# EAGLE board CT_schematic (EAGLE 7.6.0)

Size 100 x 80 mm. Coordinates in mm from the lower left corner, seen from the top.
Outline: 0,0 100,0 100,80 0,80 0,0
Copper layers (1*16): Top 0.035mm / dielectric 1.5mm / Bottom 0.035mm
Design rules "default": minimum track width 10mil, minimum drill 24mil, track to track 8mil, track to pad 8mil, pad to pad 8mil, via to via 8mil, smd to smd 8mil, copper to edge 40mil, drill to drill 8mil, minimum pad ring 10mil, minimum via ring 8mil, stop-mask expansion 4mil, vias tented up to drill 0mil, thermal gap 10mil

## Footprints (pad centres in the part's own frame; a part is rotated, then mirrored left to right if it is on the bottom)
C0603 = smd 0.8 x 0.8: 1 -0.762,0; 2 0.762,0
C0402 = smd 0.5 x 0.5: 1 -0.508,0; 2 0.508,0
EXV-9B = smd 2.718 x 1.778: 1 -2.108,0; 2 2.108,0
EXV-9H = smd 3.505 x 1.676: 1 -2.857,0; 2 2.857,0
PJ-037B_PACKAGE = drill 3.7 square: 1 12,0 | drill 3.2 square: 2 6,0
R0603 = smd 0.8 x 0.8: 1 -0.762,0; 2 0.762,0
LQFP64 = smd 0.3 x 1.2: 1 -3.75,-5.75; 2 -3.25,-5.75; 3 -2.75,-5.75; 4 -2.25,-5.75; 5 -1.75,-5.75; 6 -1.25,-5.75; 7 -0.75,-5.75; 8 -0.25,-5.75; 9 0.25,-5.75; 10 0.75,-5.75; 11 1.25,-5.75; 12 1.75,-5.75; 13 2.25,-5.75; 14 2.75,-5.75; 15 3.25,-5.75; 16 3.75,-5.75; 33 3.75,5.75; 34 3.25,5.75; 35 2.75,5.75; 36 2.25,5.75; 37 1.75,5.75; 38 1.25,5.75; 39 0.75,5.75; 40 0.25,5.75; 41 -0.25,5.75; 42 -0.75,5.75; 43 -1.25,5.75; 44 -1.75,5.75; 45 -2.25,5.75; 46 -2.75,5.75; 47 -3.25,5.75; 48 -3.75,5.75 | smd 1.2 x 0.3: 17 5.75,-3.75; 18 5.75,-3.25; 19 5.75,-2.75; 20 5.75,-2.25; 21 5.75,-1.75; 22 5.75,-1.25; 23 5.75,-0.75; 24 5.75,-0.25; 25 5.75,0.25; 26 5.75,0.75; 27 5.75,1.25; 28 5.75,1.75; 29 5.75,2.25; 30 5.75,2.75; 31 5.75,3.25; 32 5.75,3.75; 49 -5.75,3.75; 50 -5.75,3.25; 51 -5.75,2.75; 52 -5.75,2.25; 53 -5.75,1.75; 54 -5.75,1.25; 55 -5.75,0.75; 56 -5.75,0.25; 57 -5.75,-0.25; 58 -5.75,-0.75; 59 -5.75,-1.25; 60 -5.75,-1.75; 61 -5.75,-2.25; 62 -5.75,-2.75; 63 -5.75,-3.25; 64 -5.75,-3.75
SOIC-8 = smd 1.6 x 0.6: 1 -2.7,1.905 | smd 1.55 x 0.6: 2 -2.7,0.635; 3 -2.7,-0.635; 4 -2.7,-1.905; 5 2.7,-1.905; 6 2.7,-0.635; 7 2.7,0.635; 8 2.7,1.905
TST-110-05-T-D-RA = drill 1 pad 1.7 square: 1 0,0 | drill 1 pad 1.7: 2 0,2.54; 3 2.54,0; 4 2.54,2.54; 5 5.08,0; 6 5.08,2.54; 7 7.62,0; 8 7.62,2.54; 9 10.16,0; 10 10.16,2.54; 11 12.7,0; 12 12.7,2.54; 13 15.24,0; 14 15.24,2.54; 15 17.78,0; 16 17.78,2.54; 17 20.32,0; 18 20.32,2.54; 19 22.86,0; 20 22.86,2.54
TFBGA-153 = smd 0.3 x 0.3: A1 -3.25,3.25; A2 -2.75,3.25; A3 -2.25,3.25; A4 -1.75,3.25; A5 -1.25,3.25; A6 -0.75,3.25; A7 -0.25,3.25; A8 0.25,3.25; A9 0.75,3.25; A10 1.25,3.25; A11 1.75,3.25; A12 2.25,3.25; A13 2.75,3.25; A14 3.25,3.25; B1 -3.25,2.75; B2 -2.75,2.75; B3 -2.25,2.75; B4 -1.75,2.75; B5 -1.25,2.75; B6 -0.75,2.75; B7 -0.25,2.75; B8 0.25,2.75; B9 0.75,2.75; B10 1.25,2.75; B11 1.75,2.75; B12 2.25,2.75; B13 2.75,2.75; B14 3.25,2.75; C1 -3.25,2.25; C2 -2.75,2.25; C3 -2.25,2.25; C4 -1.75,2.25; C5 -1.25,2.25; C6 -0.75,2.25; C7 -0.25,2.25; C8 0.25,2.25; C9 0.75,2.25; C10 1.25,2.25; C11 1.75,2.25; C12 2.25,2.25; C13 2.75,2.25; C14 3.25,2.25; D1 -3.25,1.75; D2 -2.75,1.75; D3 -2.25,1.75; D4 -1.75,1.75; D12 2.25,1.75; D13 2.75,1.75; D14 3.25,1.75; E1 -3.25,1.25; E2 -2.75,1.25; E3 -2.25,1.25; E5 -1.25,1.25; E6 -0.75,1.25; E7 -0.25,1.25; E8 0.25,1.25; E9 0.75,1.25; E10 1.25,1.25; E12 2.25,1.25; E13 2.75,1.25; E14 3.25,1.25; F1 -3.25,0.75; F2 -2.75,0.75; F3 -2.25,0.75; F5 -1.25,0.75; F10 1.25,0.75; F12 2.25,0.75; F13 2.75,0.75; F14 3.25,0.75; G1 -3.25,0.25; G2 -2.75,0.25; G3 -2.25,0.25; G5 -1.25,0.25; G10 1.25,0.25; G12 2.25,0.25; G13 2.75,0.25; G14 3.25,0.25; H1 -3.25,-0.25; H2 -2.75,-0.25; H3 -2.25,-0.25; H5 -1.25,-0.25; H10 1.25,-0.25; H12 2.25,-0.25; H13 2.75,-0.25; H14 3.25,-0.25; J1 -3.25,-0.75; J2 -2.75,-0.75; J3 -2.25,-0.75; J5 -1.25,-0.75; J10 1.25,-0.75; J12 2.25,-0.75; J13 2.75,-0.75; J14 3.25,-0.75; K1 -3.25,-1.25; K2 -2.75,-1.25; K3 -2.25,-1.25; K5 -1.25,-1.25; K6 -0.75,-1.25; K7 -0.25,-1.25; K8 0.25,-1.25; K9 0.75,-1.25; K10 1.25,-1.25; K12 2.25,-1.25; K13 2.75,-1.25; K14 3.25,-1.25; L1 -3.25,-1.75; L2 -2.75,-1.75; L3 -2.25,-1.75; L12 2.25,-1.75; L13 2.75,-1.75; L14 3.25,-1.75; M1 -3.25,-2.25; M2 -2.75,-2.25; M3 -2.25,-2.25; M4 -1.75,-2.25; M5 -1.25,-2.25; M6 -0.75,-2.25; M7 -0.25,-2.25; M8 0.25,-2.25; M9 0.75,-2.25; M10 1.25,-2.25; M11 1.75,-2.25; M12 2.25,-2.25; M13 2.75,-2.25; M14 3.25,-2.25; N1 -3.25,-2.75; N2 -2.75,-2.75; N3 -2.25,-2.75; N4 -1.75,-2.75; N5 -1.25,-2.75; N6 -0.75,-2.75; N7 -0.25,-2.75; N8 0.25,-2.75; N9 0.75,-2.75; N10 1.25,-2.75; N11 1.75,-2.75; N12 2.25,-2.75; N13 2.75,-2.75; N14 3.25,-2.75; P1 -3.25,-3.25; P2 -2.75,-3.25; P3 -2.25,-3.25; P4 -1.75,-3.25; P5 -1.25,-3.25; P6 -0.75,-3.25; P7 -0.25,-3.25; P8 0.25,-3.25; P9 0.75,-3.25; P10 1.25,-3.25; P11 1.75,-3.25; P12 2.25,-3.25; P13 2.75,-3.25; P14 3.25,-3.25
ABLS-25.000MHZ-B2F-T = smd 5.6 x 2.8: 1 -3.81,0; 2 5.69,0
ASEK = smd 1.4 x 1: 1 -1.1,-0.8; 2 1.1,-0.8; 3 1.1,0.8; 4 -1.1,0.8
LP2954 = smd 1.6 x 0.6: 1 -2.475,1.905 | smd 1.55 x 0.6: 2 -2.475,0.635; 3 -2.475,-0.635; 4 -2.475,-1.905; 5 2.475,-1.905; 6 2.475,-0.635; 7 2.475,0.635; 8 2.475,1.905
SON-6 = smd 0.55 x 0.3: 1 -0.355,0.5 | smd 0.52 x 0.3: 2 -0.37,0; 3 -0.37,-0.5; 4 0.37,-0.5; 5 0.37,0; 6 0.37,0.5
SW_4-1437565-2 = smd 1.4 x 2.1: 1 -2.23,4.55; 2 -2.23,-4.55; 3 2.23,4.55; 4 2.23,-4.55
LGM67K-G1J2-24-Z = smd 0.8 x 1.4: A -2,0; C 0,0
NC7SZ125M5X = smd 1.3 x 0.7: 1 -1.3,0.95; 2 -1.3,0; 3 -1.3,-0.95; 4 1.3,-0.95; 5 1.3,0.95

## Placement (x,y rotation side)
C1  1e-07  [C0603]  -22.86,74.93 0 top  (outside the outline)
C2  1e-07  [C0603]  -26.67,74.93 0 top  (outside the outline)
C3  1e-07  [C0603]  -30.48,74.93 0 top  (outside the outline)
C4  1e-07  [C0603]  -34.29,74.93 0 top  (outside the outline)
C5  4.7e-06  [C0603]  -64.77,69.85 0 top  (outside the outline)
C6  1e-07  [C0603]  -38.1,74.93 0 top  (outside the outline)
C7  1e-08  [C0603]  -41.91,74.93 0 top  (outside the outline)
C8  1e-06  [C0603]  -45.72,74.93 0 top  (outside the outline)
C9  1e-11  [C0402]  -64.77,74.93 0 top  (outside the outline)
C10  1e-11  [C0402]  -68.58,74.93 0 top  (outside the outline)
C11  1e-08  [C0402]  -15.24,80.01 0 top  (outside the outline)
C12  1e-08  [C0402]  -19.05,80.01 0 top  (outside the outline)
C13  1e-07  [C0402]  -22.86,80.01 0 top  (outside the outline)
C14  1e-07  [C0402]  -26.67,80.01 0 top  (outside the outline)
C15  1e-07  [C0402]  -30.48,80.01 0 top  (outside the outline)
C16  2.2e-06  [C0603]  -68.58,69.85 0 top  (outside the outline)
C17  2.2e-06  [C0603]  -15.24,74.93 0 top  (outside the outline)
C18  1e-07  [C0402]  -34.29,80.01 0 top  (outside the outline)
C19  1e-07  [C0402]  -38.1,80.01 0 top  (outside the outline)
C20  2.2e-06  [C0603]  -19.05,74.93 0 top  (outside the outline)
C21  1e-08  [C0402]  -41.91,80.01 0 top  (outside the outline)
C22  1e-06  [EXV-9B]  -50.8,50.8 0 top  (outside the outline)
C23  2.2e-06  [EXV-9B]  -59.69,50.8 0 top  (outside the outline)
C24  1e-07  [C0402]  -45.72,80.01 0 top  (outside the outline)
C25  0.0001  [EXV-9H]  -38.1,44.45 0 top  (outside the outline)
C26  0.0001  [EXV-9H]  -49.53,44.45 0 top  (outside the outline)
C27  1e-08  [C0402]  -49.53,80.01 0 top  (outside the outline)
C28  1e-08  [C0402]  -53.34,80.01 0 top  (outside the outline)
C29  1e-08  [C0402]  -57.15,80.01 0 top  (outside the outline)
J1  PJ-037B  [PJ-037B_PACKAGE]  -41.91,7.62 0 top  (outside the outline)
R2  1000.0  [R0603]  -49.53,74.93 0 top  (outside the outline)
R4  4700.0  [R0603]  -53.34,74.93 0 top  (outside the outline)
R5  4700.0  [R0603]  -57.15,74.93 0 top  (outside the outline)
R6  10000.0  [R0603]  -59.69,58.42 0 top  (outside the outline)
R7  10000.0  [R0603]  -64.77,58.42 0 top  (outside the outline)
R8  10000.0  [R0603]  -69.85,58.42 0 top  (outside the outline)
R9  10000.0  [R0603]  -15.24,64.77 0 top  (outside the outline)
R10  10000.0  [R0603]  -20.32,64.77 0 top  (outside the outline)
R11  10000.0  [R0603]  -25.4,64.77 0 top  (outside the outline)
R12  10000.0  [R0603]  -30.48,64.77 0 top  (outside the outline)
R13  10000.0  [R0603]  -35.56,64.77 0 top  (outside the outline)
R14  10000.0  [R0603]  -40.64,64.77 0 top  (outside the outline)
R15  10000.0  [R0603]  -45.72,64.77 0 top  (outside the outline)
R16  10000.0  [R0603]  -50.8,64.77 0 top  (outside the outline)
R17  10000.0  [R0603]  -55.88,64.77 0 top  (outside the outline)
R18  10000.0  [R0603]  -60.96,64.77 0 top  (outside the outline)
R19  34000.0  [R0603]  -66.04,64.77 0 top  (outside the outline)
R20  34000.0  [R0603]  -71.12,64.77 0 top  (outside the outline)
R21  34000.0  [R0603]  -15.24,69.85 0 top  (outside the outline)
R22  34000.0  [R0603]  -20.32,69.85 0 top  (outside the outline)
R23  34000.0  [R0603]  -25.4,69.85 0 top  (outside the outline)
R24  34000.0  [R0603]  -30.48,69.85 0 top  (outside the outline)
R25  34000.0  [R0603]  -35.56,69.85 0 top  (outside the outline)
R26  34000.0  [R0603]  -40.64,69.85 0 top  (outside the outline)
R27  34000.0  [R0603]  -45.72,69.85 0 top  (outside the outline)
R28  34000.0  [R0603]  -50.8,69.85 0 top  (outside the outline)
R29  100000.0  [R0603]  -34.29,58.42 0 top  (outside the outline)
R30  100000.0  [R0603]  -39.37,58.42 0 top  (outside the outline)
R31  164658.62  [R0603]  -29.21,58.42 0 top  (outside the outline)
R32  100000.0  [R0603]  -44.45,58.42 0 top  (outside the outline)
R33  10000.0  [R0603]  -55.88,69.85 0 top  (outside the outline)
R34  10000.0  [R0603]  -60.96,69.85 0 top  (outside the outline)
R35  9100.0  [R0603]  -60.96,74.93 0 top  (outside the outline)
R36  680000.0  [R0603]  -49.53,58.42 0 top  (outside the outline)
R37  120000.0  [R0603]  -54.61,58.42 0 top  (outside the outline)
U1  STM32L162RDT6  [LQFP64]  -54.61,7.62 0 top  (outside the outline)
U2  AT25080B-SSHL-T  [SOIC-8]  -60.96,22.86 0 top  (outside the outline)
U3  AT25128B-SSHL-T  [SOIC-8]  -24.13,35.56 0 top  (outside the outline)
U4  TST-110-05-T-D-RA  [TST-110-05-T-D-RA]  -63.5,31.75 0 top  (outside the outline)
U5  mtfc4gmcdm  [TFBGA-153]  -20.32,8.89 0 top  (outside the outline)
U6  ABLS-25.000MHZ-B2F-T  [ABLS-25.000MHZ-B2F-T]  -26.67,52.07 0 top  (outside the outline)
U7  ASEK-32.768KHz-ECST  [ASEK]  -29.21,44.45 0 top  (outside the outline)
U8  LP2954AIMX/NOPB  [LP2954]  -44.45,22.86 0 top  (outside the outline)
U9  TPS3895ADRYR  [SON-6]  -59.69,78.74 0 top  (outside the outline)
U10  4-1437565-2  [SW_4-1437565-2]  -27.94,24.13 0 top  (outside the outline)
U11  Q65110A2395  [LGM67K-G1J2-24-Z]  -38.1,52.07 0 top  (outside the outline)
U12  nc7sz125m5x  [NC7SZ125M5X]  -67.31,50.8 0 top  (outside the outline)
U13  nc7sz125m5x  [NC7SZ125M5X]  -15.24,58.42 0 top  (outside the outline)
U14  nc7sz125m5x  [NC7SZ125M5X]  -21.59,58.42 0 top  (outside the outline)

## Library data of the parts
C1-C29 J1 R2 R4-R37 U1-U14 = circuit_tree

## Nets
CLK_CRYSTAL_U1_5: C9.1 U1.5 U6.1
CLK_CRYSTAL_U1_6: C10.1 U1.6 U6.2
CLK_U1_3: U1.3 U7.3
GND: C1.2 C2.2 C3.2 C4.2 C5.2 C6.2 C7.2 C8.2 C9.2 C10.2 C11.2 C12.2 C13.2 C14.2 C15.2 C16.2 C17.2 C18.2 C19.2 C20.2 C21.2 C22.2 C23.2 C24.2 C25.2 C26.2 C27.2 C28.2 C29.2 J1.2 R2.2 R6.2 R18.2 R32.2 R35.2 R37.2 U1.12 U1.18 U1.31 U1.47 U1.63 U2.4 U3.4 U4.4 U4.6 U4.8 U4.10 U4.12 U4.14 U4.16 U4.18 U4.20 U5.C4 U5.E7 U5.G5 U5.H10 U5.K8 U5.N2 U5.N5 U5.P4 U5.P6 U7.2 U8.4 U9.2 U11.C U12.2 U12.3 U13.1 U13.3 U14.1 U14.3
NET_U1_1: C6.1 U1.1
NET_U1_7: R5.1 U1.7 U14.4
NET_U1_58: U11.A
NET_U1_59: U10.3 U10.4
NET_U1_60: R6.1 U1.60
NET_U2_3: R7.1 U2.3
NET_U2_7: R9.1 U2.7
NET_U3_3: R10.1 U3.3
NET_U3_7: R12.1 U3.7
NET_U4_19: R18.1 U4.19
NET_U5_C2: C17.1 C18.1 U5.C2
NET_U5_K5: R4.1 U5.K5 U13.4
NET_U8_3: R30.1 U8.3
NET_U8_5: R29.1 U8.5
NET_U8_7: R31.2 R32.1 U8.7
NET_U9_1: R34.1 R35.1 U9.1
NET_U9_3: R36.2 R37.1 U9.3
NET_U9_4: R33.1 U9.4 U12.4 U13.2 U14.2
NET_U10_1: R2.1 U10.1 U10.2
PROC_SDIO_CK: R28.1 U1.53 U5.M6
PROC_SDIO_CMD: R27.1 U1.54 U5.M5
PROC_SDIO_D0: R19.1 U1.39 U5.A3
PROC_SDIO_D1: R20.1 U1.40 U5.A4
PROC_SDIO_D2: R21.1 U1.51 U5.A5
PROC_SDIO_D3: R22.1 U1.52 U5.B2
PROC_SDIO_D4: R23.1 U1.61 U5.B3
PROC_SDIO_D5: R24.1 U1.62 U5.B4
PROC_SDIO_D6: R25.1 U1.37 U5.B5
PROC_SDIO_D7: R26.1 U1.38 U5.B6
PROC_SPI1_MISO: U1.22 U3.2
PROC_SPI1_MOSI: U1.23 U3.5
PROC_SPI1_NSS: R11.1 U1.20 U3.1
PROC_SPI1_SCK: U1.21 U3.6
PROC_SPI2_MISO: U2.2
PROC_SPI2_MOSI: U2.5
PROC_SPI2_NSS: R8.1 U2.1
PROC_SPI2_SCK: U2.6
PROC_SYS_JTCK_SWCLK: R16.1 U1.49 U4.9
PROC_SYS_JTDI: R14.1 U1.50 U4.5
PROC_SYS_JTDO_TRACESWO: U1.55 U4.13
PROC_SYS_JTMS_SWDIO: R15.1 U1.46 U4.7
PROC_SYS_JTRST: R13.1 U1.56 U4.3
RST_OUT_U4_SRESET_B: R17.1 U4.15 U12.1
VCC_S1_7V0: C22.1 C25.1 C26.1 J1.1 R30.2 U8.8
VCC_TIER1_3V3: C1.1 C2.1 C3.1 C4.1 C5.1 C7.1 C8.1 C11.1 C12.1 C13.1 C14.1 C15.1 C16.1 C19.1 C20.1 C21.1 C23.1 C24.1 C27.1 C28.1 C29.1 R4.2 R5.2 R7.2 R8.2 R9.2 R10.2 R11.2 R12.2 R13.2 R14.2 R15.2 R16.2 R17.2 R19.2 R20.2 R21.2 R22.2 R23.2 R24.2 R25.2 R26.2 R27.2 R28.2 R29.2 R31.1 R33.2 R34.2 R36.1 U1.13 U1.19 U1.32 U1.48 U1.64 U2.8 U3.8 U4.1 U4.2 U5.C6 U5.E6 U5.F5 U5.J10 U5.K9 U5.M4 U5.N4 U5.P3 U5.P5 U7.4 U8.1 U9.6 U12.5 U13.5 U14.5

## Tracks (layer width: path | path; a pad name or v marks a point on that pad's centre or on a via)
CLK_CRYSTAL_U1_5  (2 unrouted)
CLK_CRYSTAL_U1_6  (2 unrouted)
CLK_U1_3  (1 unrouted)
GND  (70 unrouted)
NET_U1_1  (1 unrouted)
NET_U1_7  (2 unrouted)
NET_U1_59  (1 unrouted)
NET_U1_60  (1 unrouted)
NET_U2_3  (1 unrouted)
NET_U2_7  (1 unrouted)
NET_U3_3  (1 unrouted)
NET_U3_7  (1 unrouted)
NET_U4_19  (1 unrouted)
NET_U5_C2  (2 unrouted)
NET_U5_K5  (2 unrouted)
NET_U8_3  (1 unrouted)
NET_U8_5  (1 unrouted)
NET_U8_7  (2 unrouted)
NET_U9_1  (2 unrouted)
NET_U9_3  (2 unrouted)
NET_U9_4  (4 unrouted)
NET_U10_1  (2 unrouted)
PROC_SDIO_CK  (2 unrouted)
PROC_SDIO_CMD  (2 unrouted)
PROC_SDIO_D0  (2 unrouted)
PROC_SDIO_D1  (2 unrouted)
PROC_SDIO_D2  (2 unrouted)
PROC_SDIO_D3  (2 unrouted)
PROC_SDIO_D4  (2 unrouted)
PROC_SDIO_D5  (2 unrouted)
PROC_SDIO_D6  (2 unrouted)
PROC_SDIO_D7  (2 unrouted)
PROC_SPI1_MISO  (1 unrouted)
PROC_SPI1_MOSI  (1 unrouted)
PROC_SPI1_NSS  (2 unrouted)
PROC_SPI1_SCK  (1 unrouted)
PROC_SPI2_NSS  (1 unrouted)
PROC_SYS_JTCK_SWCLK  (2 unrouted)
PROC_SYS_JTDI  (2 unrouted)
PROC_SYS_JTDO_TRACESWO  (1 unrouted)
PROC_SYS_JTMS_SWDIO  (2 unrouted)
PROC_SYS_JTRST  (2 unrouted)
RST_OUT_U4_SRESET_B  (2 unrouted)
VCC_S1_7V0  (5 unrouted)
VCC_TIER1_3V3  (72 unrouted)